# Altium PCB PCB1.PcbDoc
Units mil, origin at the board's own origin, x right, y up, seen from the top; angles counter-clockwise.
Board outline 1030 x 1165 mil, 2 copper layers (Top Layer, Bottom Layer); 11 components, 8 nets, 26 pads, 0 vias.
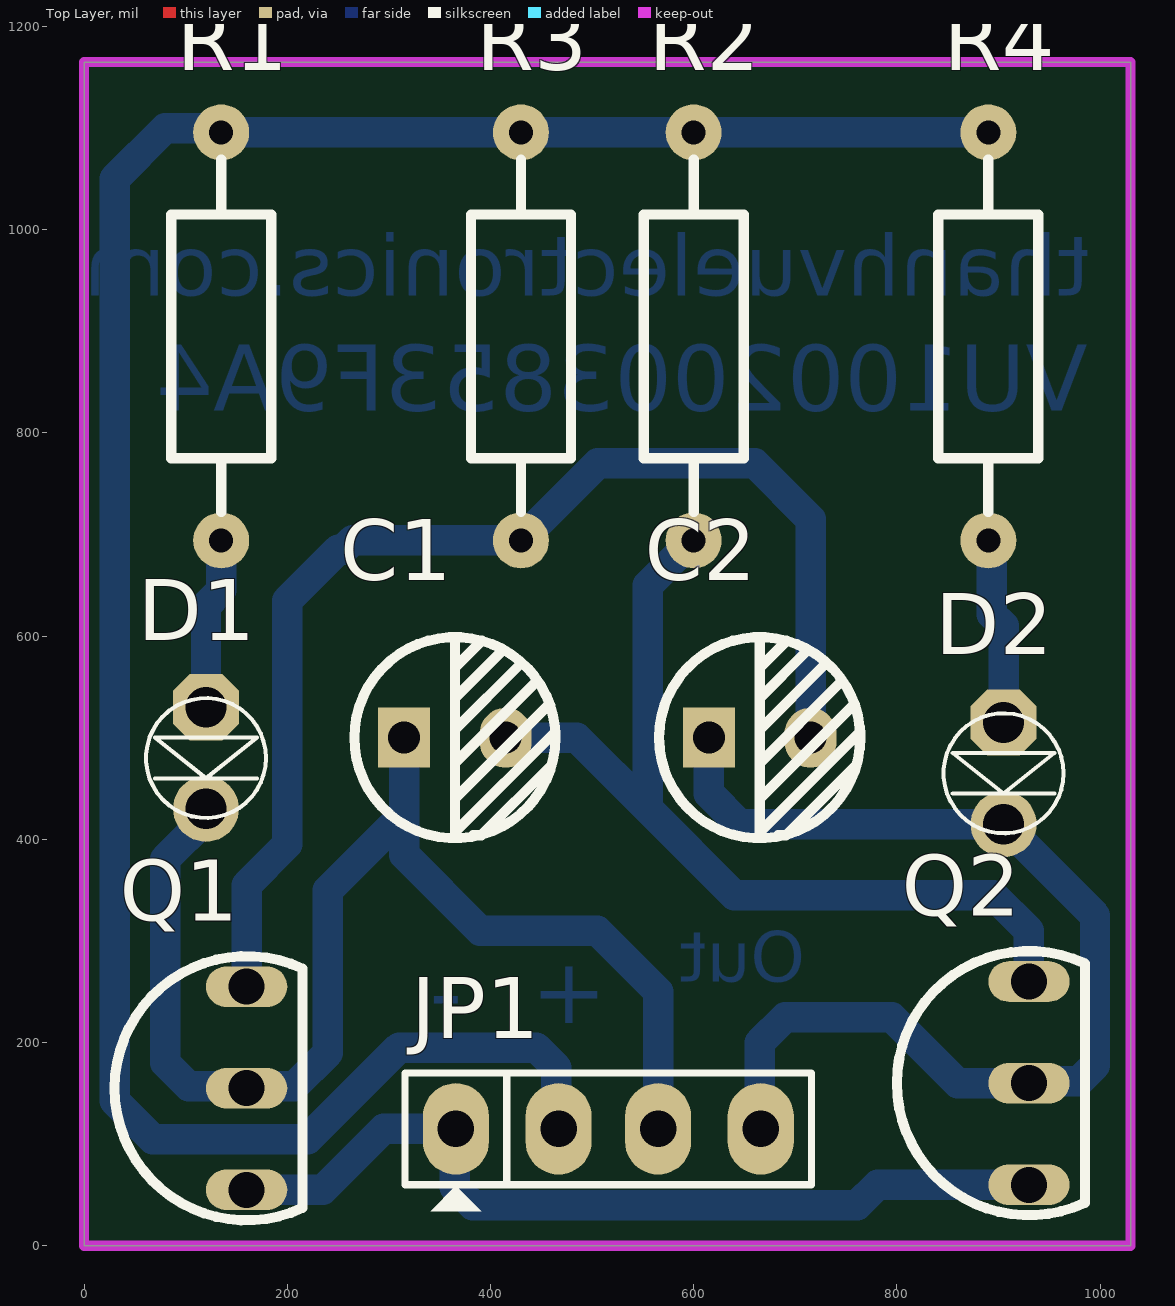
[diagram p0: Top Layer view]
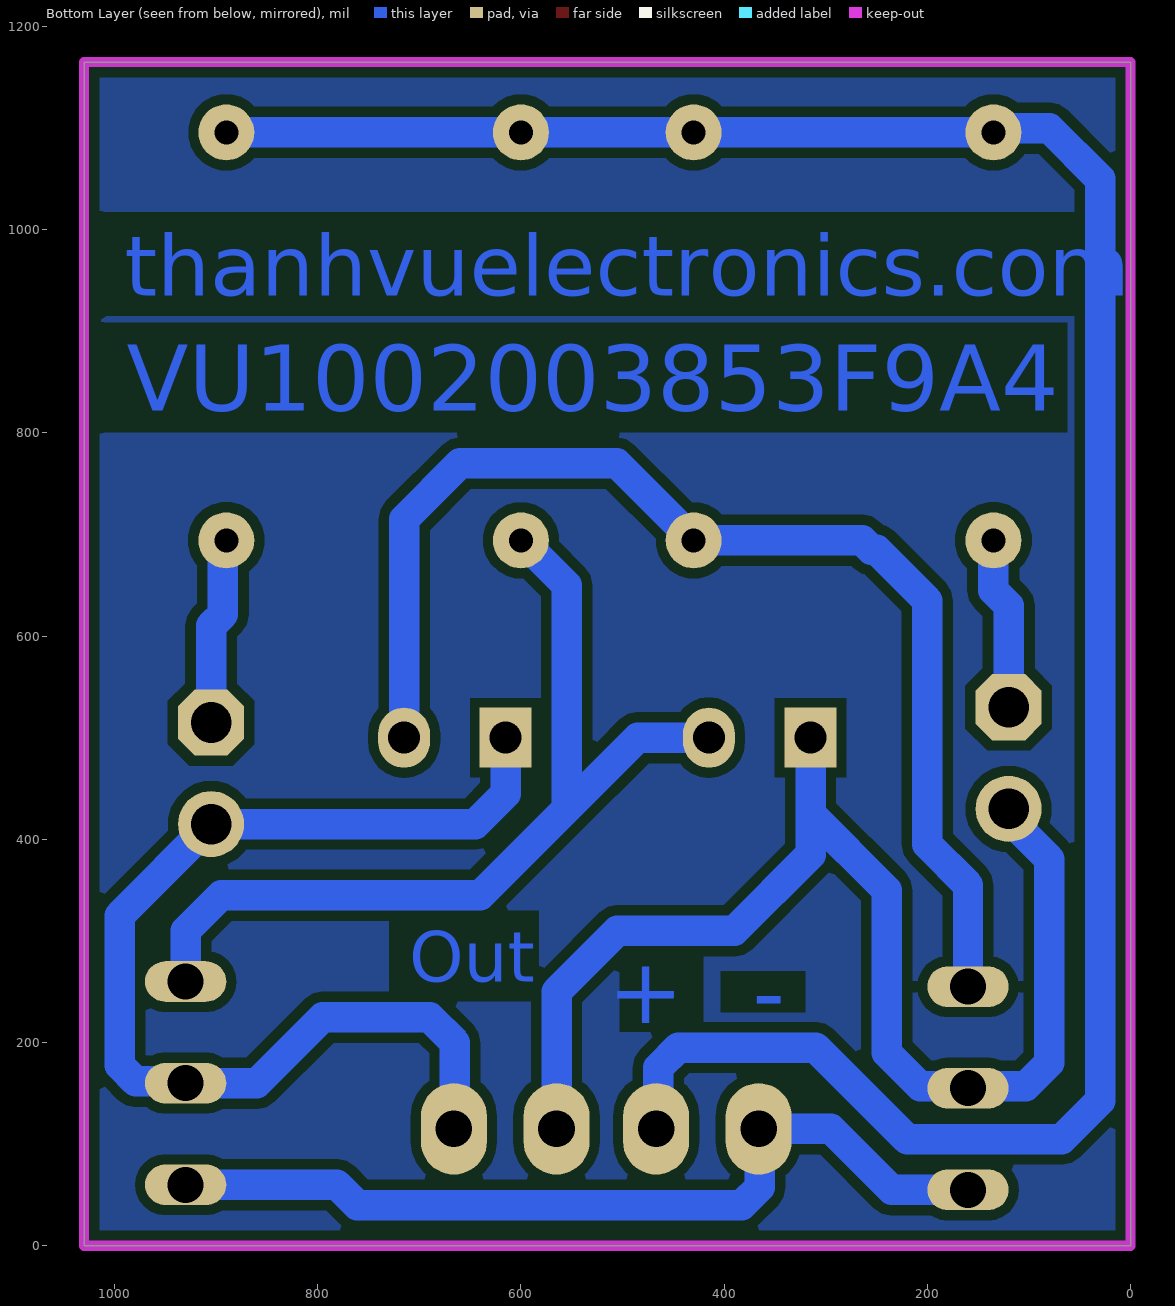
[diagram p1: Bottom Layer view, seen from below]
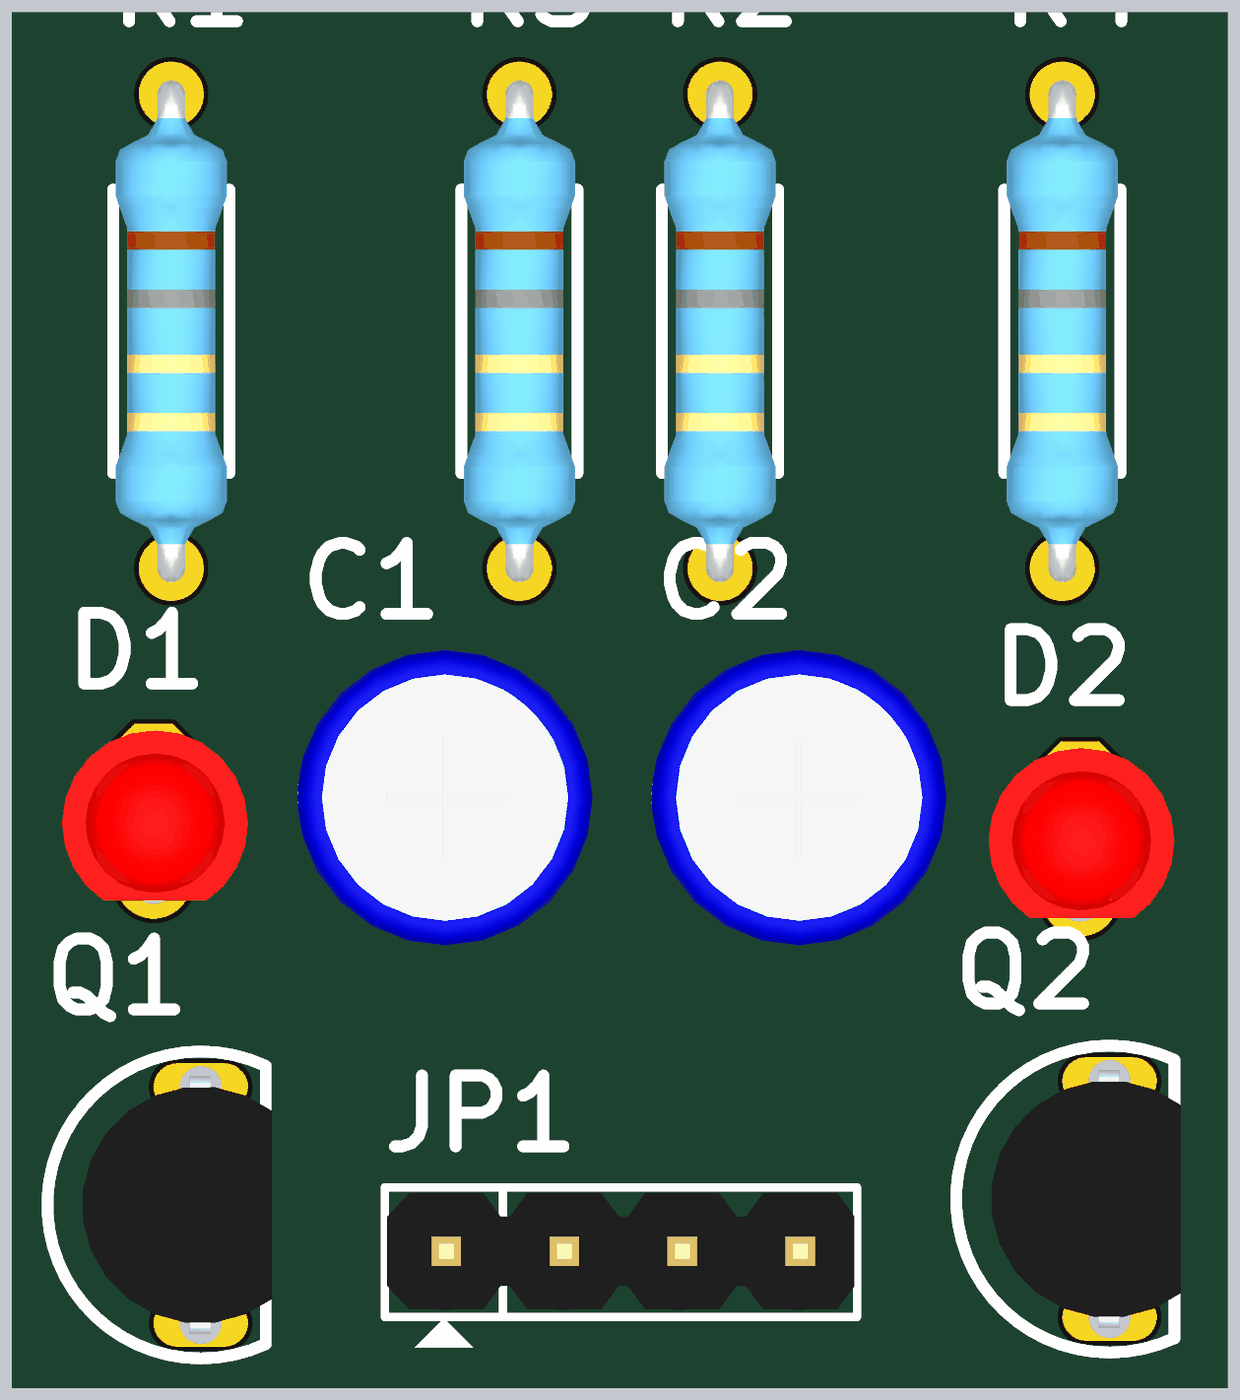
[diagram p2: 3D render of the assembled board from above, using the file's embedded part models]

## Layer stack, top to bottom
Top Solder: solder mask 0.4, Solder Resist, Dk 3.5
Top Layer: signal copper 1.4
Dielectric 1: dielectric 12.6, FR-4, Dk 4.8
Bottom Layer: signal copper 1.4
Bottom Solder: solder mask 0.4, Solder Resist, Dk 3.5

## Board outline
0,0 1030,0 1030,1165 0,1165

## Design rules (kind name [scope] priority, off if disabled: settings)
Clearance [All] p1: gap=10 ignorepadtopadclearanceinfootprint=FALSE
PolygonConnect [All] p1: connectstyle=Relief reliefconductorwidth=10 reliefentries=4 polygonreliefangle="90 Angle" airgapwidth=10
RoutingVias [All] p1: holewidth=28 width=50 viastyle="Through Hole" minholewidth=28 minwidth=50 maxholewidth=28 maxwidth=50
SolderMaskExpansion [All] p1: expansion=4 istentingtop=FALSE
Width [All] p1: maxlimit=40 minlimit=10 preferedwidth=30
30 further rules are at their usual default settings.

## Classes and differential pairs
component class Sheet2: C1 C2 D1 JP1 Q1 Q2 R1 R2 R3 R4

## Components (designator, comment, footprint, x,y, rotation, side; value= is the part's Value field where it differs from the comment)
C1 "47uF" "tu hoa 5mm" 365,500 r0 top
C2 "47uF" "tu hoa 5mm" 665,500 r0 top
D1 "LED 3mm" LED-3MM-RED 120,530 r270 top
D2 "LED 3mm" LED-3MM-RED 905,515 r270 top
JP1 "JP4 PIN" JP4 466,115 r0 top value=JP4
Q1 "C1815" TO92 160,155 r0 top value=C9014
Q2 "C1815" TO92 930,160 r0 top value=C9014
R1 "220R" "tro vach 1/4w" 135,895 r90 top
R2 "47k" "tro vach 1/4w" 600,895 r90 top
R3 "47k" "tro vach 1/4w" 430,895 r90 top
R4 "220R" "tro vach 1/4w" 890,895 r90 top

## Footprints (in the part's own frame and the unit in brackets; to place one, negate y for a bottom-side part, rotate by r counter-clockwise, add the part's x,y. Pads: shape width x height; smd on the part's side, far side on the other; paste and mask are expansions set on the pad)
JP4 [mil] "Jumper 4"
  oval 65x90 hole 36: 1(-100,0) 2(1,0) 3(99,0) 4(200,0)
  silkscreen extent -150,-81 250,55, body extent -148,-48 248,50, height 354
LED-3MM-RED [mil]
  oct 65x65 hole 40: 1(0,0)
  round 65 hole 40: 2(100,0)
  silkscreen extent -9,-59 109,59, body extent -27,-77 117,80, height 181
TO92 [mil] "TO, Flat Index; 3 In-Line, Axial Leads; Body Dia. 4.8mm"
  oval 80x40 hole 35.43: 1(0,-100) 2(0,0) 3(0,100)
  silkscreen extent -130,-130 55,130, body extent -100,-109 61,109, height 343
"tro vach 1/4w" [mm]
  round 1.4 hole 0.6: 1(-5.1,0) 2(5.1,0)
  silkscreen extent -4.39,-1.25 4.42,1.25, body extent -5.38,-1.2 5.38,1.2, height 2.41
"tu hoa 5mm" [mm]
  rect 1.3x1.5 hole 0.8: 1(-1.27,0)
  oval 1.3x1.5 hole 0.8: 2(1.27,0)
  silkscreen extent -2.51,-2.51 2.51,2.51, body extent -3.12,-3.18 3.23,3.18, height 14.55

## Part data
C1 C2: library part "Tu Hoa 47uF 16V 5x10", "Cắm", Chung_Loai=Cắm, Don_Vi=Con, Ma_Hang=MH006859, So_Chan=2, Ten_Linh_Kien="Tụ Hóa 47uF 16V"
D1 D2: library part "LED 3mm Do", "Cắm", Chung_Loai=Cắm, Don_Vi=Con, Ma_Hang=MH003892, Ten_Linh_Kien="Led 3MM Phủ Đỏ (10c)"
JP1: library part JP4
Q1 Q2: library part "Trans C1815 DIP", "NPN transistor"
R1 R4: library part "Tro Vach 1/4W 5% 220R", "Cắm", Chung_Loai=Cắm, Don_Vi=Con, Ma_Hang=MH007300, So_Chan=2, Ten_Linh_Kien="Trở Vạch 1/4w 5% 220R"
R2 R3: library part "Tro Vach 1/4W 5% 47k", "Cắm", Chung_Loai=Cắm, Don_Vi=Con, Ma_Hang=MH004982, So_Chan=2, Ten_Linh_Kien="Trở Vạch 1/4w 5% 47k"

## Nets (pads, with @x,y where several pads share a name; then routed paths per layer and width w, separated by ;. In a path a pad name is that pad's centre, name@x,y a point inside that pad or via, vN(x,y) a via of type N, cw(c..) or ccw(c..) an arc to the next point about the centre after c; other vN are vias at no path point)
NetC1_1: C1.1 D1.2 JP1.3 Q1.2 | length 1273.4
  Bottom Layer w30: D1.2 120,420.53 80,380.53 80,180 103.09,156.91 158.09,156.91 Q1.2 161.91,156.91 206.91,156.91 240,190 240,350 315,425 ; C1.1 315,425 ; JP1.3 565,250 505,310 390,310 315,385 315,425
NetC1_2: C1.2 Q2.3 R2.1 | length 930.7
  Bottom Layer w30: C1.2@412.43,502.57 C1.2 485,500 555,430 ; R2.1 599.21,694.21 555,650 555,430 ; Q2.3 930,310 895,345 640,345 555,430
NetC2_1: C2.1 D2.2 JP1.4 Q2.2 | length 1092.1
  Bottom Layer w30: C2.1 615,445 645,415 D2.2 995,325 995,177.57 979.34,161.91 931.91,161.91 Q2.2 860,160 795,225 690,225 665,200 665,116 JP1.4
NetC2_2: C2.2 Q1.3 R3.1 | length 1205.3
  Bottom Layer w30: Q1.3 160,355 200,395 200,635 250,685 255,685 264.21,694.21 R3.1 505.79,770 660,770 715,715 C2.2
NetD1_1: D1.1 R1.1 | length 184.6
  Bottom Layer w30: D1.1@130.04,540.04 D1.1 120,630 135,645 R1.1
NetD2_1: D2.1 R4.1 | length 185.4
  Bottom Layer w30: R4.1 893.35,690.87 893.35,621.65 905,610 D2.1
NetJP1_1: JP1.1 Q1.1 Q2.1 | length 869.3
  Bottom Layer w30: Q1.1 235,55 295,115 JP1.1 365,114 365,57.57 382.57,40 761.15,40 781.15,60 Q2.1
NetJP1_2: JP1.2 R1.2 R2.2 R3.2 R4.2 | length 2346.8
  Bottom Layer w30: JP1.2 464.95,117.05 464.95,175.05 445,195 310,195 220,105 67.57,105 30,142.57 30,1050 80,1100 130.79,1100 R1.2 R3.2 R2.2 R4.2

## Polygon pours and split planes (outlines as drawn)
no net on Bottom Layer "NONET_L02_P000" (solid, pour order 0): 0,1165 1030,1165 1030,0 0,0

## Keep-outs
Keep-Out Layer:
  the board outline again, w10

## Other copper
Bottom Layer:
  text "thanhvuelectronics.com" at 990,935 h60
  text "VU1002003853F9A4" at 988,822 h65
  text "Out" at 710,260 h50
  text "+" at 440,219.17 h65
  text "-" at 340,217.51 h65